# Altium PCB touch_control_400.PcbDoc
Units mm, origin at the board's own origin, x right, y up, seen from the top; angles counter-clockwise.
Board outline 400.1 x 20.1 mm, 4 copper layers (Top Layer, Int1 (Guard), Int2 (PWR), Bottom Layer), stack 1.573 mm thick; 24 components, 25 nets, 110 pads, 4 vias.
Unrouted connection lines stored in the file: 69.
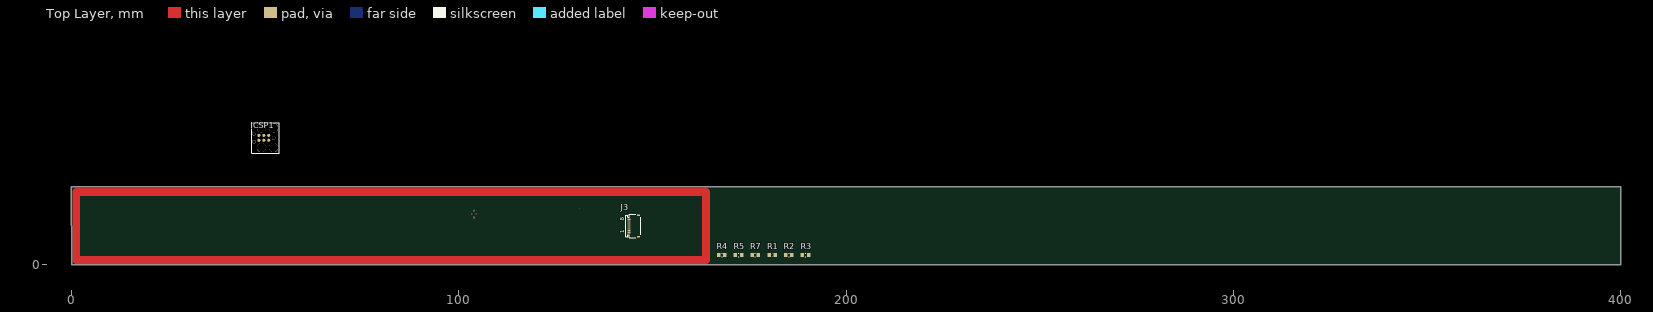
[diagram p0: Top Layer view]
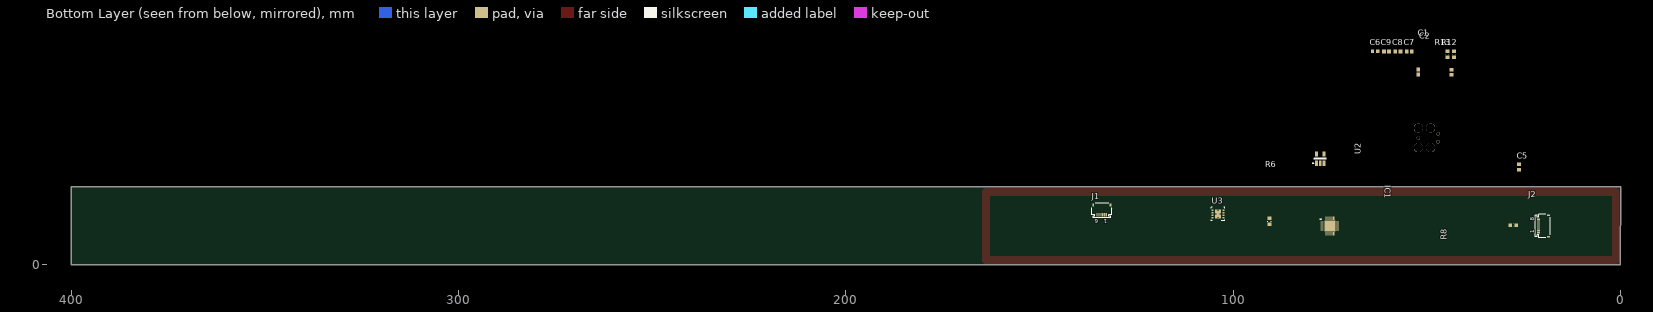
[diagram p1: Bottom Layer view, seen from below]
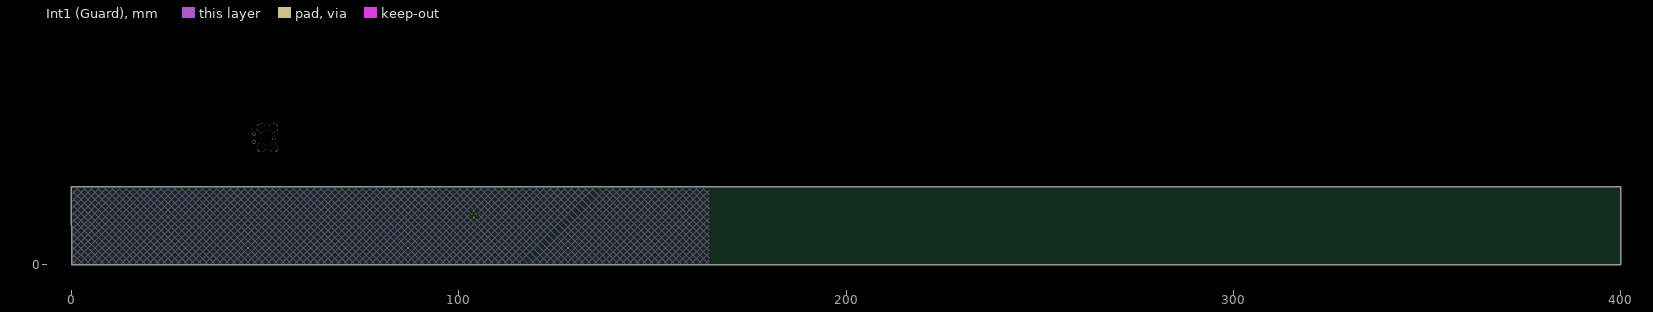
[diagram p2: Int1 (Guard)]
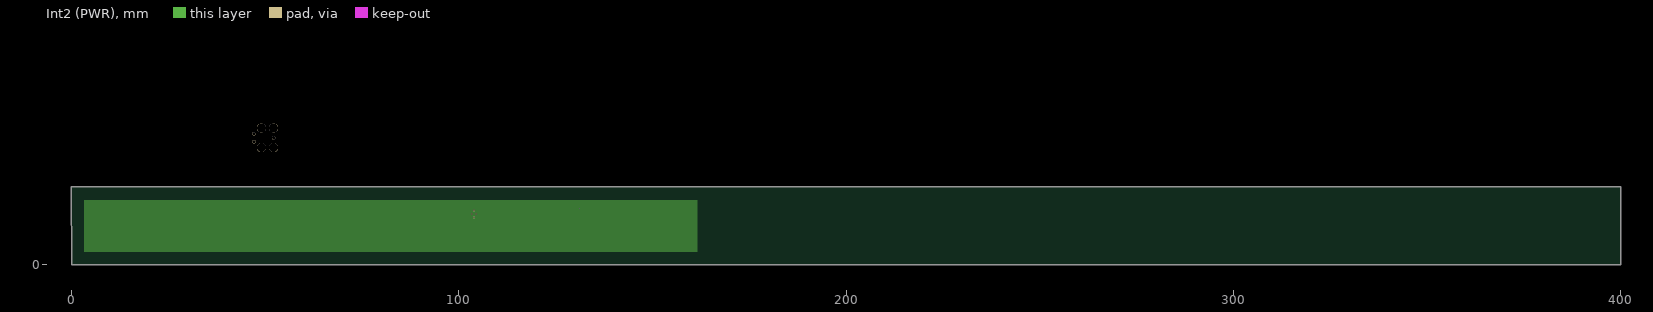
[diagram p3: Int2 (PWR)]

## Layer stack, top to bottom
Top Solder: solder mask 0.0254, SM-001, Dk 4
Top Layer: signal copper 0.035
Dielectric 1: prepreg 0.1803, PP-021, Dk 4.7
Dielectric 2: prepreg 0.1803, PP-021, Dk 4.7
Int1 (Guard): signal copper 0.035
Dielectric 3: core 0.7112, Core-039, Dk 4.8
Int2 (PWR): signal copper 0.035
Dielectric 4: prepreg 0.1803, PP-021, Dk 4.7
Dielectric 5: prepreg 0.1803, PP-021, Dk 4.7
Bottom Layer: signal copper 0.035
Bottom Solder: solder mask 0.0254, SM-001, Dk 4

## Board outline
0,0 400,0 400,20.1 -0.1,20.1
cut-out: 131.1,14.4

## Design rules (kind name [scope] priority, off if disabled: settings)
BoardOutlineClearance [All] p1: gap=0.2 ignorepadtopadclearanceinfootprint=FALSE except(0.4: Arc-SplitBarrior Arc-SplitContinuation Track-SplitBarrior Track-SplitContinuation SMDPad-SplitBarrior SMDPad-SplitContinuation THPad-SplitBarrior THPad-SplitContinuation Via-SplitBarrior Via-SplitContinuation Fill-SplitBarrior Fill-SplitContinuation Poly-SplitBarrior Poly-SplitContinuation Region-SplitBarrior Region-SplitContinuation Text-SplitBarrior Text-SplitContinuation)
Clearance "Clearance Bottom Layer" [OnLayer('Bottom Layer')] p1: gap=0.203 ignorepadtopadclearanceinfootprint=TRUE except(0.254: Arc-Text Track-Text SMDPad-Text THPad-Text Via-Text Fill-Text Poly-Text Region-Text Text-Text)
Clearance "Clearance Top Layer" [OnLayer('Top Layer')] p2: gap=0.203 ignorepadtopadclearanceinfootprint=TRUE except(0.254: Arc-Text Track-Text SMDPad-Text THPad-Text Via-Text Fill-Text Poly-Text Region-Text Text-Text)
Clearance [All] p3: gap=0.2 ignorepadtopadclearanceinfootprint=FALSE except(0.089: Arc-Arc Arc-Track Arc-SMDPad Track-Track Track-SMDPad SMDPad-SMDPad; 0.127: Arc-Via Track-Via SMDPad-Via THPad-Via Via-Via; 0.254: Arc-Text Track-Text SMDPad-Text THPad-Text Via-Text Fill-Text Poly-Text Region-Text Text-Text)
DiffPairsRouting RS485 [InDifferentialPair('RS485')] p1: maxlimit=0.127 minlimit=0.127 mostfreqgap=0.127 toplayer_minwidth=0.157 toplayer_maxwidth=0.589 toplayer_prefwidth=0.157 midlayer1_minwidth=0.063 midlayer1_maxwidth=0.343 midlayer1_prefwidth=0.063 midlayer2_minwidth=0.063 midlayer2_maxwidth=0.343 midlayer2_prefwidth=0.063 bottomlayer_minwidth=0.157 bottomlayer_maxwidth=0.589 bottomlayer_prefwidth=0.157 impedanceprofiledriven=TRUE impedanceprofileid={A137A21B-FC63-43BB-B182-D2C5AB81EC2A} impedanceprofilevalue=100.000000 maxuncoupledlength=12.7
DiffPairsRouting [All] p2: maxlimit=0.254 minlimit=0.254 mostfreqgap=0.254 toplayer_minwidth=0.381 toplayer_maxwidth=0.381 toplayer_prefwidth=0.381 midlayer1_minwidth=0.381 midlayer1_maxwidth=0.381 midlayer1_prefwidth=0.381 midlayer2_minwidth=0.381 midlayer2_maxwidth=0.381 midlayer2_prefwidth=0.381 bottomlayer_minwidth=0.381 bottomlayer_maxwidth=0.381 bottomlayer_prefwidth=0.381 maxuncoupledlength=12.7
HoleSize [All] p1: absolutevalues=TRUE maxlimit=6.3 minlimit=0.2 maxpercent=80.000 minpercent=20.000
MinimumAnnularRing [All] p1: minimumring=0.076
MinimumSolderMaskSliver [All] p1: minsoldermaskwidth=0.1
PolygonConnect PolygonConnect_1 [All] p1: thpad.connectstyle=Relief thpad.reliefconductorwidth=0.508 thpad.reliefentries=4 thpad.polygonreliefangle="90 Angle" thpad.airgapwidth=0.254 smdpad.connectstyle=Relief smdpad.reliefconductorwidth=0.508 smdpad.reliefentries=4 smdpad.polygonreliefangle="90 Angle" smdpad.airgapwidth=0.254 via.connectstyle=Direct via.reliefconductorwidth=0.508 via.reliefentries=4 via.polygonreliefangle="90 Angle" via.airgapwidth=0.254
PolygonConnect [All] p2: connectstyle=Relief reliefconductorwidth=0.254 reliefentries=4 polygonreliefangle="90 Angle" airgapwidth=0.254
RoutingCorners [All] p1: cornerstyle=Round minsetback=2.54 maxsetback=2.54
RoutingVias [All] p1: holewidth=0.5 width=1 viastyle="Through Hole" minholewidth=0.2 minwidth=0.45 maxholewidth=1 maxwidth=2
SilkToSilkClearance [All] p1: silktosilkclearance=0.1
SilkToSolderMaskClearance [IsPad] p1: minsilkscreentomaskgap=0.1 clearancetoexposedcopper=TRUE
SolderMaskExpansion [All] p1: expansion=0.102
Width C_SENSE_WIDTH [InNetClass('CS[0..5]')] p1: maxlimit=0.2 minlimit=0.1 preferedwidth=0.18
Width [All] p2: maxlimit=2.54 minlimit=0.089 preferedwidth=0.381
24 further rules are at their usual default settings.

## Classes and differential pairs
net class C_SENSE: CS0 GUARD GUARD_S SCS0
differential pair RS485: +RS485_P -RS485_N

## Components (designator, comment, footprint, x,y, rotation, side; value= is the part's Value field where it differs from the comment)
C1 "1uF" CAPC1608X95X40NL15T15 52.2,49.765 r270 bottom
C2 "0.1uF" CAPC1608X95X40NL15T15 43.6,49.7 r270 bottom
C5 "10uF" CAPC1608X90X35NL10T15 26.2,25.225 r270 bottom
C6 "10uF" CAPC1608X90X35NL10T15 63.345,55.115 r180 bottom
C7 "1uF" CAPC1608X95X40NL15T15 54.487,55.09 r180 bottom
C8 "1uF" CAPC1608X95X40NL15T15 57.448,55.09 r180 bottom
C9 "0.1uF" CAPC1608X95X40NL15T15 60.409,55.09 r180 bottom
IC1 "PIC16LF1559-I_GZ" QFN50P400X400X55-21N-D 75,10 r180 bottom
ICSP1 "ICSP PIC" TC2030-MCP 52.17,32.765 r180 top
J1 "687106182122" 687106182122 133.9,14 r0 bottom
J2 "687108182122" 687108182122 20,10 r90 bottom
J3 "687108182122" 687108182122 145,10 r90 top
R1 "10K" RESC0603(1608)_N 180.9,2.5 r0 top value="10000.00 Ohm"
R2 "10K" RESC0603(1608)_N 185.2,2.5 r0 top value="10000.00 Ohm"
R3 "10K" RESC0603(1608)_N 189.5,2.5 r0 top value="10000.00 Ohm"
R4 "10K" RESC0603(1608)_N 167.9,2.5 r0 top value="10000.00 Ohm"
R5 "10K" RESC0603(1608)_N 172.2,2.5 r0 top value="10000.00 Ohm"
R6 "10K" RESC0603(1608)_N 90.6,11.2 r270 bottom value="10000.00 Ohm"
R7 "10K" RESC0603(1608)_N 176.5,2.5 r0 top value="10000.00 Ohm"
R8 "10K" RESC0603(1608)_N 27.664,10.2 r180 bottom value="10000.00 Ohm"
R12 "100R" RESC0603(1608)_N 42.956,54.34 r90 bottom value="10000.00 Ohm"
R13 "10K" RESC0603(1608)_N 44.667,54.34 r90 bottom value="10000.00 Ohm"
U2 "MCP1801T-3302I/OT" SOT-23-OT5_M 77.5,27.4 r90 bottom
U3 "SN65HVD75DRBT" DRB0008B_V 103.9,13.1 r0 bottom

## Footprints (in the part's own frame and the unit in brackets; to place one, negate y for a bottom-side part, rotate by r counter-clockwise, add the part's x,y. Pads: shape width x height; smd on the part's side, far side on the other; paste and mask are expansions set on the pad)
687106182122 [mm] "ZIF Connectors, Horizontal, Dual Contact Back Locking, pitch 0.5mm, 6p"
  rect 0.3x0.8 smd: 1(-1.25,1.1) 2(-0.75,1.1) 3(-0.25,1.1) 4(0.25,1.1) 5(0.75,1.1) 6(1.25,1.1)
  rect 0.4x0.8 smd: MP1(-2.25,-1.4) MP2(2.25,-1.4)
  silkscreen extent -2.57,-1.92 2.58,1.92, body extent -2.5,-1.85 2.5,1.85, height 0.98
687108182122 [mm] "ZIF Connectors, Horizontal, Dual Contact Back Locking, pitch 0.5mm, 8p"
  rect 0.3x0.8 smd: 1(-1.75,1.1) 2(-1.25,1.1) 3(-0.75,1.1) 4(-0.25,1.1) 5(0.25,1.1) 6(0.75,1.1) 7(1.25,1.1) 8(1.75,1.1)
  rect 0.4x0.8 smd: MP1(-2.75,-1.4) MP2(2.75,-1.4)
  silkscreen extent -3.07,-1.92 3.08,1.92, body extent -3,-1.85 3,1.85, height 0.98
CAPC1608X90X35NL10T15 [mm] "Chip Capacitor, 2-Leads, Body 1.60x0.80mm, IPC Medium Density"
  rect 0.85x0.95 smd: 1(-0.675,0) 2(0.675,0)
  body extent -0.85,-0.45 0.85,0.45, height 0.9
CAPC1608X95X40NL15T15 [mm] "Chip Capacitor, 2-Leads, Body 1.60x0.80mm, IPC Medium Density"
  rect 0.95x1 smd: 1(-0.65,0) 2(0.65,0)
  body extent -0.88,-0.48 0.87,0.47, height 0.95
DRB0008B_V [mm] "SON, 8-Leads, Body 3x3mm, Pitch 0.65mm, Thermal Pad 2.4x1.65mm, TI Recommended"
  rrect33% 0.6x0.3 smd: 1(-1.4,0.975) 2(-1.4,0.325) 3(-1.4,-0.325) 4(-1.4,-0.975) 5(1.4,-0.975) 6(1.4,-0.325) 7(1.4,0.325) 8(1.4,0.975)
  rrect6% 1.65x2.4 smd paste-1.2: 9(0,0)
  silkscreen extent -1.73,-1.73 1.73,1.73, body extent -1.5,-1.5 1.5,1.5, height 0.96
QFN50P400X400X55-21N-D [mm]
  rect 0.8x0.3 smd: 1(-2,1) 2(-2,0.5) 3(-2,0) 4(-2,-0.5) 5(-2,-1) 11(2,-1) 12(2,-0.5) 13(2,0) 14(2,0.5) 15(2,1)
  rect 0.3x0.8 smd: 6(-1,-2) 7(-0.5,-2) 8(0,-2) 9(0.5,-2) 10(1,-2) 16(1,2) 17(0.5,2) 18(0,2) 19(-0.5,2) 20(-1,2)
  rect 2.8x2.8 smd: 21(0,0)
  silkscreen extent -2.53,1.63 -2.28,1.87, body extent -2.05,-2.05 2.05,2.05, height 0.55
RESC0603(1608)_N [mm] "Chip Resistor, Body 1.6x0.8mm, IPC Medium Density"
  rect 0.9x1 smd: 1(-0.8,0) 2(0.8,0)
  silkscreen extent -0.05,-0.4 0.05,0.4, body extent -0.85,-0.47 0.85,0.47, height 0.6
SOT-23-OT5_M [mm] "SOT23, 5-Leads, Body 2.9x1.7mm, Pitch 0.95mm, Lead Span 2.8mm, IPC Low Density"
  rect 1.3x0.7 smd: 1(-1.2,0.95) 2(-1.2,0) 3(-1.2,-0.95) 4(1.2,-0.95) 5(1.2,0.95)
  silkscreen extent -1.32,-1.55 0.15,1.98, body extent -0.9,-1.55 0.9,1.55, height 1.45
TC2030-MCP [mil]
  round 31 smd: 1(50,-25) 2(50,25) 3(100,-25) 4(100,25) 5(150,-25) 6(150,25)
  round 34 hole 35 unplated: A(0,0) B(200,40) C(200,-40)
  round 92 hole 93 unplated: D(0,-100) E(125,-100) F(0,100) G(125,100)
  silkscreen extent -55,-155 225,155

## Part data
C1 C7 C8: library part CMP-2006-00046-1, Manufacturer=Vitramon, Part Number=VJ0603G105KXYCW1BC
C2 C9: library part CMP-2006-01884-1, Manufacturer=Vitramon, Part Number=VJ0603Y104JXQCW1BC
C5 C6: library part CMP-2006-02792-1, Manufacturer=Murata, Part Number=GRM188R60J106ME47D
IC1: "Integrated Circuit", Manufacturer_Name=Microchip, Manufacturer_Part_Number=PIC16LF1559-I/GZ, Mouser Part Number=579-PIC16LF1559-I/GZ, Datasheet Link=http://ww1.microchip.com/downloads/en/DeviceDoc/40001761E.pdf, Height=0.55mm, Mouser Price/Stock=https://www.mouser.com/Search/Refine.aspx?Keyword=579-PIC16LF1559-I%2FGZ
J1: library part CMP-1502-01645-1, "SMT ZIF Connectors WR-FPC, Horizontal, Back Locking Dual Contact, pitch 0.5 mm, 6 pins", Contact Resistance=30mOhm, Manufacturer="Wurth Elektronik", Operating Temperature=-55to85degC, Rated Current=0.5A, Withstanding Voltage=250VAC, Working Voltage=50VAC, Contact Design=BackLockingDualContact, Datasheet URL=https://katalog.we-online.de/em/datasheet/687106182122.pdf, Manufacturer URL=http://www.we-online.de, Mounting Technology=SMT, Orientation=Horizontal, Package Reference=687106182122, Packaging=TapeandReel, Part Number=687106182122, Pin Number=6, Pitch=0.5mm, Publisher=WurthElektronik
J2 J3: library part CMP-1502-01646-1, "SMT ZIF Connectors WR-FPC, Horizontal, Back Locking Dual Contact, pitch 0.5 mm, 8 pins", Contact Resistance=30mOhm, Manufacturer="Wurth Elektronik", Operating Temperature=-55to85degC, Rated Current=0.5A, Withstanding Voltage=250VAC, Working Voltage=50VAC, Contact Design=BackLockingDualContact, Datasheet URL=https://katalog.we-online.de/em/datasheet/687108182122.pdf, Manufacturer URL=http://www.we-online.de, Mounting Technology=SMT, Orientation=Horizontal, Package Reference=687108182122, Packaging=TapeandReel, Part Number=687108182122, Pin Number=8, Pitch=0.5mm, Publisher=WurthElektronik
R1 R2 R3 R4 R5 R6 R7 R8 R12 R13: library part CMP-1012-00623-1, "10K 0.1W 1% 0603 (1608 Metric)  SMD", Case-EIA=0603, Case-Metric=1608, Power="0.1 W", Tolerance="1 %", Technology=SMT
U2: library part CMP-0136-00719-1, "150 mA, High PSRR, Low Quiescent Current LDO, 5-Pin SOT-23, Industrial Temperature, Tape and Reel", Code_IPC=SOT23-5, DatasheetVersion="revC, Jan-2009", PackageDescription="5-Lead Plastic Small Outline Transistor (OT) [SOT-23]", PackageReference=SOT-23-OT5, PackageVersion="revBB, Aug-2009"
U3: library part CMP-0694-00015-2, "3.3 V Supply RS-485 with IEC ESD Protection, 20 Mbps, -40 to 125 degC, 8-Pin SON, RoHS, Tape and Reel", Manufacturer="Texas Instruments", Operating Temperature Range="-40 to 125 degC", ComponentLink1Description="Manufacturer URL", ComponentLink1URL=http://www.ti.com/, ComponentLink2Description=Datasheet, ComponentLink2URL=http://www.ti.com/lit/ds/sllse11c/sllse11c.pdf, ComponentLink3Description="Package Specification", ComponentLink3URL=http://www.ti.com/lit/ds/sllse11c/sllse11c.pdf, DatasheetVersion=SLLSE11C, ESD="15 kV", ICC (Max) (mA)=0.95, Mounting Technology="Surface Mount", No. of RX=1, No. of TX=1, PackageDescription="8-Pin Plastic Small Outline No-Lead, Body 3 x 3 mm, Pitch 0.65 mm", PackageReference=DRB0008B, PackageVersion=4203482-2/K, Packing="Tape and Reel", PartNumber=SN65HVD75DRBT, RoHS=TRUE, Signaling Rate (Max) (Mbps)=20, VCC="3 to 3.6 V", VI="-7 to 12 V"

## Via types
v1: diameter 0.5, hole 0.2, Top Layer to Bottom Layer, 4 vias

## Nets (pads, with @x,y where several pads share a name; then routed paths per layer and width w, separated by ;. In a path a pad name is that pad's centre, name@x,y a point inside that pad or via, vN(x,y) a via of type N, cw(c..) or ccw(c..) an arc to the next point about the centre after c; other vN are vias at no path point)
+5: C5.2 C6.2 C7.2 J2.8 J3.1 U2.1 U2.3
CS0: IC1.13 R8.1
GND: C1.1 C2.1 C5.1 C6.1 C7.1 C8.1 C9.1 IC1.17 IC1.21 ICSP1.3 J1.3 J2.1 J2.4 J3.5 J3.8 R4.2 R5.2 R7.2 R13.2 U2.2 U3.5 U3.9
  other v1: 103.9,12.15 103.325,13.1 104.475,13.1 103.9,14.05
GPIO0: IC1.19 J2.7 J3.2
GUARD: IC1.6 R6.1
GUARD_S: R6.2
M\C\L\R\/VPP: IC1.1 ICSP1.1
PGC: IC1.15 ICSP1.5
PGD: IC1.16 ICSP1.4
RS485_A: J2.3 J3.6
RS485_B: J2.2 J3.7
RS485_N: R12.1 U3.6
RS485_P: R12.2 U3.7
RTS: IC1.20 J2.5 J3.4 R13.1 U3.2 U3.3
RX: IC1.9 J1.1 U3.1
SCL_SY: IC1.8 J1.5
SCS0: R8.2 | length 360.4
  Top Layer w2: 1.2,1.2 163.8,1.2 163.8,18.8 1.2,18.8 1.2,1.2
SDA_SX: IC1.10 J1.4
SEL0: IC1.2 R1.2 R4.1
SEL1: IC1.3 R2.2 R5.1
SEL2: IC1.4 R3.2 R7.1
SigIn0: IC1.14 J3.3
SigOut0: IC1.5 J2.6
TX: IC1.7 J1.6 U3.4
VCC: C1.2 C2.2 C8.2 C9.2 IC1.18 ICSP1.2 J1.2 R1.1 R2.1 R3.1 U2.5 U3.8
pads on no net: IC1.11 IC1.12 ICSP1.6 ICSP1.A ICSP1.B ICSP1.C ICSP1.D ICSP1.E ICSP1.F ICSP1.G J1.MP1 J1.MP2 J2.MP1 J2.MP2 J3.MP1 J3.MP2 U2.4

## Polygon pours and split planes (outlines as drawn)
GUARD_S on Int1 (Guard) "GUARD_S_L02_P002" (hatched 45Degree grid 1.27 track 0.18, pour order 2): 0,20 165,20 165,0 0,0
GND on Int2 (PWR) "GND_L03_P004" (solid, pour order 4): 161.6,16.7 161.6,3.3 3.304,3.3 3.304,16.7

## Dimensions
145,10.5 to 400,0 on Mechanical 1
-0.1,20.1 to 0,0 on Mechanical 1
-0.1,20.1 to 400,20.1 on Mechanical 1

## Text inside footprints (layer, text, board x,y; h text height)
J1: Bottom Overlay "6" at 134.8,11.7 h1.02 r180; Bottom Overlay "1" at 132.5,11.7 h1.02 r180
J2: Bottom Overlay "1" at 22.3,8.1 h1.02 r270; Bottom Overlay "8" at 22.3,11.4 h1.02 r270
J3: Top Overlay "1" at 142.7,8.1 h1.02 r90; Top Overlay "8" at 142.7,11.4 h1.02 r90